# Altium PCB BLERADAR-V12.PcbDoc
Units mil, origin at the board's own origin, x right, y up, seen from the top; angles counter-clockwise.
Board outline 2362.2 x 905.51 mil, 2 copper layers (Top Layer, Bottom Layer), stack 39.335 mil thick; 54 components, 30 nets, 236 pads, 29 vias.
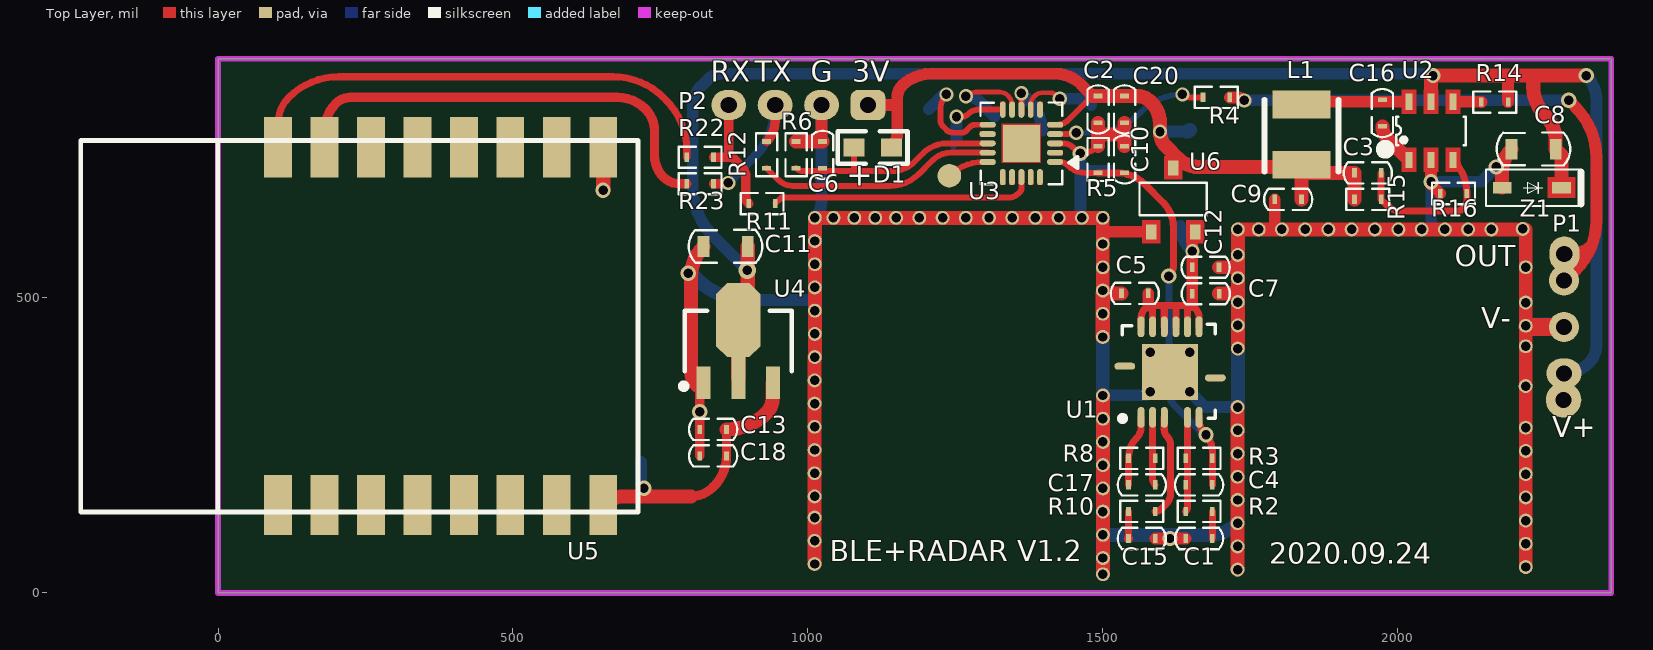
[diagram p0: Top Layer view]
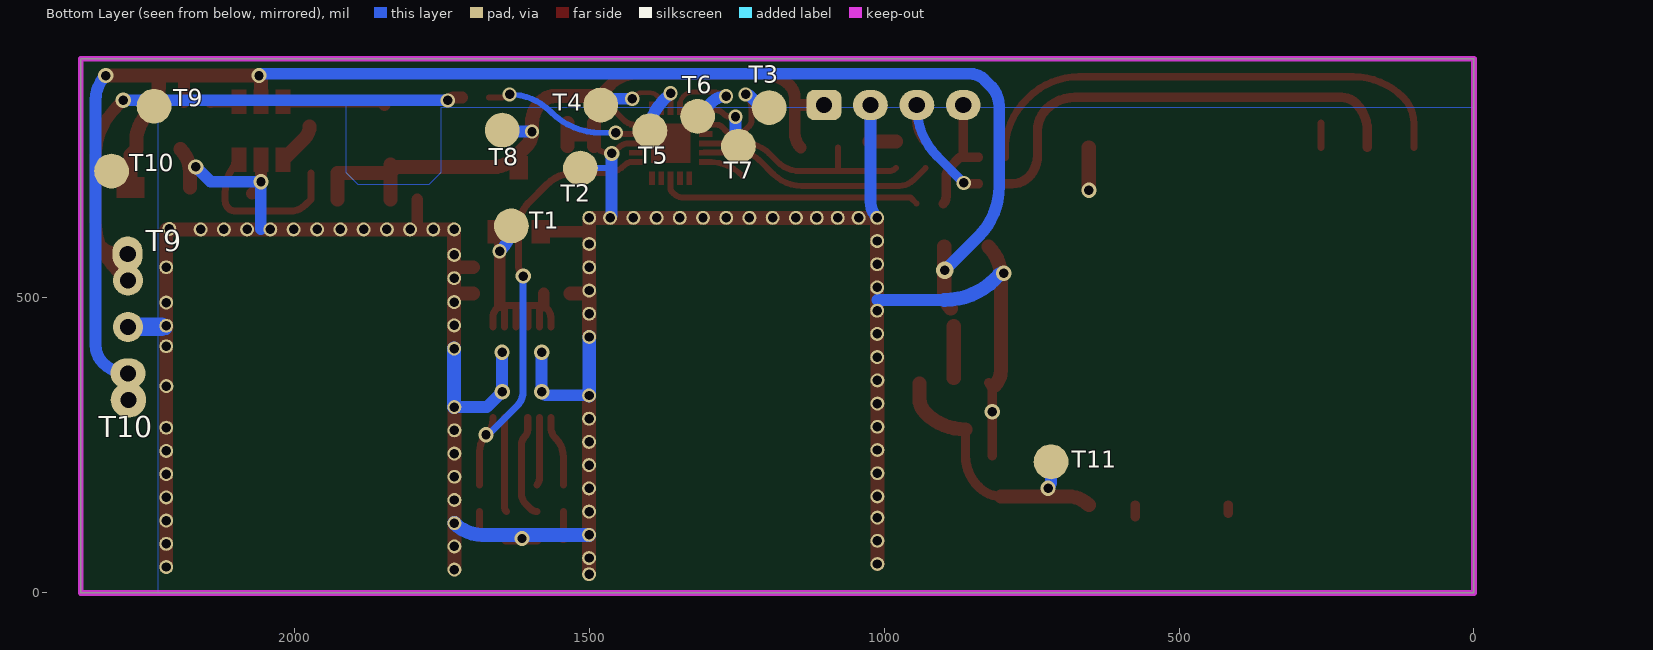
[diagram p1: Bottom Layer view, seen from below]

## Layer stack, top to bottom
Top Layer: signal copper 1.4
Dielectric: core 36.5354, FR-4, Dk 4.8
Bottom Layer: signal copper 1.4

## Board outline
0,0 2362.2,0 2362.2,905.51 0,905.51

## Design rules (kind name [scope] priority, off if disabled: settings)
Clearance [All] p0: scope1count=1 scope1_0_kind=Board scope1_0_value=Board scope2count=1 scope2_0_kind=Board scope2_0_value=Board commentlength=0 gap=10
Clearance [All] p1: gap=10
ComponentClearance [All] p0: scope1count=1 scope1_0_kind=Board scope1_0_value=Board scope2count=1 scope2_0_kind=Board scope2_0_value=Board commentlength=0 gap=10 collisioncheckmode=3
ComponentClearance [All] p1: gap=10 collisioncheckmode=3 verticalgap=10
DiffPairsRouting [All] p0: scope1count=1 scope1_0_kind=Board scope1_0_value=Board scope2count=1 scope2_0_kind=Board scope2_0_value=Board commentlength=0
FanoutControl Fanout_Default [All] p0: scope1count=1 scope1_0_kind=Board scope1_0_value=Board scope2count=1 scope2_0_kind=Board scope2_0_value=Board commentlength=30 // Fanout_Default (Default Rule)
FanoutControl Fanout_Small [All] p0 off: scope1count=1 scope1_0_kind=Board scope1_0_value=Board scope2count=1 scope2_0_kind=Board scope2_0_value=Board commentlength=84 // Protel DXP Scope 1 Expression Was: (CompPinCount < 5)   Fanout_Small (Default Rule)
FanoutControl Fanout_SOIC [All] p0 off: scope1count=1 scope1_0_kind=Board scope1_0_value=Board scope2count=1 scope2_0_kind=Board scope2_0_value=Board commentlength=71 // Protel DXP Scope 1 Expression Was: IsSOIC   Fanout_SOIC (Default Rule)
FanoutControl Fanout_LCC [All] p0 off: scope1count=1 scope1_0_kind=Board scope1_0_value=Board scope2count=1 scope2_0_kind=Board scope2_0_value=Board commentlength=69 // Protel DXP Scope 1 Expression Was: IsLCC   Fanout_LCC (Default Rule)
FanoutControl Fanout_BGA [All] p0 off: scope1count=1 scope1_0_kind=Board scope1_0_value=Board scope2count=1 scope2_0_kind=Board scope2_0_value=Board commentlength=69 // Protel DXP Scope 1 Expression Was: IsBGA   Fanout_BGA (Default Rule)
Height [All] p0: scope1count=1 scope1_0_kind=Board scope1_0_value=Board scope2count=1 scope2_0_kind=Board scope2_0_value=Board commentlength=0
HoleSize [All] p0: scope1count=1 scope1_0_kind=Board scope1_0_value=Board scope2count=1 scope2_0_kind=Board scope2_0_value=Board commentlength=0 absolutevalues=TRUE maxlimit=100 minlimit=1 maxpercent=80.000 minpercent=20.000
LayerPairs [All] p0: scope1count=1 scope1_0_kind=Board scope1_0_value=Board scope2count=1 scope2_0_kind=Board scope2_0_value=Board commentlength=0 enforce=TRUE
PasteMaskExpansion [All] p0: scope1count=1 scope1_0_kind=Board scope1_0_value=Board scope2count=1 scope2_0_kind=Board scope2_0_value=Board commentlength=0 expansion=0
PlaneClearance [All] p0: scope1count=1 scope1_0_kind=Board scope1_0_value=Board scope2count=1 scope2_0_kind=Board scope2_0_value=Board commentlength=0 clearance=20
PlaneConnect [All] p0: scope1count=1 scope1_0_kind=Board scope1_0_value=Board scope2count=1 scope2_0_kind=Board scope2_0_value=Board commentlength=0 planeconnectstyle=Relief reliefexpansion=20 reliefentries=4 reliefconductorwidth=10 reliefairgap=10
PolygonConnect [All] p0: scope1count=1 scope1_0_kind=Board scope1_0_value=Board scope2count=1 scope2_0_kind=Board scope2_0_value=Board commentlength=0 connectstyle=Direct reliefconductorwidth=10 reliefentries=4 polygonreliefangle="90 Angle"
PolygonConnect [All] p1: connectstyle=Direct reliefconductorwidth=10 reliefentries=4 polygonreliefangle="90 Angle"
RoutingCorners [All] p0: scope1count=1 scope1_0_kind=Board scope1_0_value=Board scope2count=1 scope2_0_kind=Board scope2_0_value=Board commentlength=0 cornerstyle=45-Degree minsetback=100 maxsetback=100
RoutingLayers [All] p0: scope1count=1 scope1_0_kind=Board scope1_0_value=Board scope2count=1 scope2_0_kind=Board scope2_0_value=Board commentlength=0 top layer=Automatic bottom layer=Automatic
RoutingPriority [All] p0: scope1count=1 scope1_0_kind=Board scope1_0_value=Board scope2count=1 scope2_0_kind=Board scope2_0_value=Board commentlength=0
RoutingTopology [All] p0: scope1count=1 scope1_0_kind=Board scope1_0_value=Board scope2count=1 scope2_0_kind=Board scope2_0_value=Board commentlength=0 topology=Shortest
RoutingVias [All] p0: scope1count=1 scope1_0_kind=Board scope1_0_value=Board scope2count=1 scope2_0_kind=Board scope2_0_value=Board commentlength=0 holewidth=28 width=50 viastyle="Through Hole" minholewidth=28 minwidth=50 maxholewidth=28 maxwidth=50
RoutingVias [All] p1: holewidth=28 width=50 viastyle="Through Hole" minholewidth=28 minwidth=50 maxholewidth=28 maxwidth=50
ShortCircuit [All] p0: scope1count=1 scope1_0_kind=Board scope1_0_value=Board scope2count=1 scope2_0_kind=Board scope2_0_value=Board commentlength=0 allowed=FALSE
SolderMaskExpansion [All] p0: scope1count=1 scope1_0_kind=Board scope1_0_value=Board scope2count=1 scope2_0_kind=Board scope2_0_value=Board commentlength=0 expansion=4
SolderMaskExpansion [All] p1: expansion=4
TestPointUsage [All] p0: scope1count=1 scope1_0_kind=Board scope1_0_value=Board scope2count=1 scope2_0_kind=Board scope2_0_value=Board commentlength=0 valid=0 allowmultiple=FALSE
TestPointUsage [All] p1: valid=0 allowmultiple=FALSE
Testpoint [All] p0: scope1count=1 scope1_0_kind=Board scope1_0_value=Board scope2count=1 scope2_0_kind=Board scope2_0_value=Board commentlength=0 side=3 testpointundercomponent=TRUE minsize=40 maxsize=100 preferedsize=60 minholesize=0 maxholesize=40 preferedholesize=32 testpointgrid=1 style=297 order=0-112345678
Testpoint [All] p1: side=3 testpointundercomponent=TRUE minsize=40 maxsize=100 preferedsize=60 minholesize=0 maxholesize=40 preferedholesize=32 testpointgrid=1 style=297 order=0-112345678
UnRoutedNet [All] p0: scope1count=1 scope1_0_kind=Board scope1_0_value=Board scope2count=1 scope2_0_kind=Board scope2_0_value=Board commentlength=0
Width [All] p0: scope1count=1 scope1_0_kind=Board scope1_0_value=Board scope2count=1 scope2_0_kind=Board scope2_0_value=Board commentlength=0 maxlimit=60 minlimit=8 preferedwidth=10
Width [All] p1: maxlimit=60 minlimit=8 preferedwidth=10 toplayer_prefwidth=8 bottomlayer_minwidth=10 minimp=50.000000 maximp=50.000000 favimp=50.000000
18 further rules are at their usual default settings.

## Components (designator, comment, footprint, x,y, rotation, side; value= is the part's Value field where it differs from the comment)
C1 "4.7uF" C0402 1685.94,92.05 r180 top
C2 "10uF" C0402 1492.05,842.32 r270 top
C3 "22pF" C0402 1972.05,712.05 r180 top
C4 "1nF" C0402 1685.94,182.99 r180 top
C5 "0.5pF" C0402 1577.05,507.68 r180 top
C6 "0.1uF" C0402 1025,720 r90 top
C7 "0.1uF" C0402 1652.05,507.05 r0 top
C8 "10uF/16V" C0603 2267.05,752.05 r180 top
C9 "10uF" C0402 1837.05,667.05 r180 top
C10 "0.1uF" C0402 1537.05,712.05 r90 top
C11 "10uF/16V" C0603 897.05,587.05 r180 top (schematic designator C8)
C12 "10uF" C0402 1651.85,552.05 r0 top
C13 "10uF" C0402 862.05,277.05 r180 top (schematic designator C5)
C15 "1nF" C0402 1588.94,92.05 r180 top
C16 "0.1uF" C0402 1974.18,836.12 r270 top
C17 "1nF" C0402 1588.94,182.99 r180 top
C18 "0.1uF" C0402 862.05,232.05 r180 top (schematic designator C5)
C20 "0.1uF" C0402 1537.05,797.05 r90 top
D1 "PT19-21C" LED-0603 1110,755 r0 top
L1 "PRS3015-100MT" PRS3015 1837.05,832.05 r270 top
P1 "PH2.0-3P" PH2.0-3P 2282.05,372.05 r90 top
P2 "PH2.0-4P" PH2.0-5P 1102.05,827.05 r180 top (schematic designator P1)
R2 "2k" R0402 1685.94,137.99 r180 top
R3 "1M" R0402 1685.94,227.99 r180 top
R4 "200" R0402 1670,840 r0 top
R5 "47k" R0402 1492.05,712.05 r90 top
R6 "47k" R0402 980,720 r90 top
R8 "5.1k" R0402 1588.94,227.99 r180 top
R10 "5.1k" R0402 1588.94,137.99 r180 top
R11 "1k" R0402 945,660 r180 top
R12 "1k" R0402 930,720 r90 top
R14 "47k" R0402 2142.05,832.05 r0 top
R15 "47k" R0402 1972.05,667.05 r180 top
R16 "12k" R0402 2072.05,677.05 r0 top
R22 "1k" R0402 839.98,738.57 r180 top (schematic designator R12)
R23 "1k" R0402 839.98,693.57 r180 top (schematic designator R12)
T1 "" TestPoints#1 1632.05,622.05 r180 bottom
T2 "" TestPoints#1 1515,720 r180 bottom
T3 "" TestPoints#2 1195,835 r180 bottom
T4 "" TestPoints#3 1422.05,827.05 r180 bottom
T5 "" TestPoints#4 1397.05,782.05 r180 bottom
T6 "" TestPoints#5 1317.05,807.05 r180 bottom
T7 "" TestPoints#1 1247.05,757.05 r180 bottom
T8 "" TestPoints#6 1547.05,657.05 r270 bottom
T9 "" TestPoints#7 2230,825 r180 bottom (schematic designator T2)
T10 "" TestPoints#1 2310,715 r180 bottom (schematic designator T2)
T11 "" TestPoints#1 717.05,222.05 r180 bottom (schematic designator T1)
U1 "XBR816" XBR816 1732.28,315.28 r90 top
U2 "SY8120B1ABC" SOT-23-6 2019.18,734.05 r90 top
U3 "HC89S003F4" QFN20(3*3) 1362.05,762.05 r180 top
U4 "ME6208A33PG" SOT89N 882.05,427.05 r90 top (schematic designator U18)
U5 "BT3L" ZS3L 712.05,137.05 r90 top
U6 "ME6216A12M3G" SOT-23-L 1582.05,612.05 r90 top
Z1 "SESD3Z12C" SOD-323 2177.05,687.05 r0 top

## Footprints (in the part's own frame and the unit in brackets; to place one, negate y for a bottom-side part, rotate by r counter-clockwise, add the part's x,y. Pads: shape width x height; smd on the part's side, far side on the other; paste and mask are expansions set on the pad)
C0402 [mm]
  rect 0.2x0.4 smd: 1(0,0) 2(1.15,0)
  silkscreen extent -0.46,-0.46 1.61,0.46
C0603 [mil]
  rect 19.8x35.55 smd: 1(-0.92,0) 2(74,0)
  silkscreen extent -25,-28 99,28
LED-0603 [mm]
  rect 0.9x0.762 smd: 1(-0.8,0) 2(0.8,0)
  silkscreen extent -1.5,-0.7 1.5,0.7
PH2.0-3P [mm]
  oval 1.3x1.5 hole 0.7: 1(0,0)
  round 1.3 hole 0.7: 2(2,0) 3(4,0)
PH2.0-5P [mm]
  rrect50% 1.5x1.3 hole 0.7: 1(0,0)
  oval 1.5x1.3 hole 0.7: 2(2,0) 3(4,0) 4(6,0)
PRS3015 [mm]
  rect 1.2x2.5 smd: 1(0.1,0) 2(2.7,0)
  silkscreen extent -0.1,-1.6 3,1.6
QFN20(3*3) [mm]
  rect 1.6x1.6 smd: 0(0,0)
  oval 0.7x0.25 smd: 1(-1.45,0.8) 2(-1.45,0.4) 3(-1.45,0) 4(-1.45,-0.4) 5(-1.45,-0.8) 11(1.45,-0.8) 12(1.45,-0.4) 13(1.45,0) 14(1.45,0.4) 15(1.45,0.8)
  oval 0.25x0.7 smd: 6(-0.8,-1.45) 7(-0.4,-1.45) 8(0,-1.45) 9(0.4,-1.45) 10(0.8,-1.45) 16(0.8,1.45) 17(0.4,1.45) 18(0,1.45) 19(-0.4,1.45) 20(-0.8,1.45)
  Top Layer region: -0.925,-1.8 -0.675,-1.8 -0.675,-1.219 -0.925,-1.219
  Top Layer region: -0.85,-0.85 0.85,-0.85 0.85,0.85 -0.85,0.85
  Top Layer region: -0.525,-1.8 -0.275,-1.8 -0.275,-1.219 -0.525,-1.219
  Top Layer region: -0.125,-1.8 0.125,-1.8 0.125,-1.219 -0.125,-1.219
  Top Layer region: 0.275,-1.8 0.525,-1.8 0.525,-1.219 0.275,-1.219
  Top Layer region: 0.675,-1.8 0.925,-1.8 0.925,-1.219 0.675,-1.219
  Top Layer region: 1.8,-0.925 1.8,-0.675 1.219,-0.675 1.219,-0.925
  Top Layer region: 1.8,-0.525 1.8,-0.275 1.219,-0.275 1.219,-0.525
  Top Layer region: 1.8,-0.125 1.8,0.125 1.219,0.125 1.219,-0.125
  Top Layer region: 1.8,0.275 1.8,0.525 1.219,0.525 1.219,0.275
  Top Layer region: 1.8,0.675 1.8,0.925 1.219,0.925 1.219,0.675
  Top Layer region: 0.925,1.8 0.675,1.8 0.675,1.219 0.925,1.219
  Top Layer region: 0.525,1.8 0.275,1.8 0.275,1.219 0.525,1.219
  Top Layer region: 0.125,1.8 -0.125,1.8 -0.125,1.219 0.125,1.219
  Top Layer region: -0.275,1.8 -0.525,1.8 -0.525,1.219 -0.275,1.219
  Top Layer region: -0.675,1.8 -0.925,1.8 -0.925,1.219 -0.675,1.219
  Top Layer region: -1.8,0.925 -1.8,0.675 -1.219,0.675 -1.219,0.925
  Top Layer region: -1.8,0.525 -1.8,0.275 -1.219,0.275 -1.219,0.525
  Top Layer region: -1.8,0.125 -1.8,-0.125 -1.219,-0.125 -1.219,0.125
  Top Layer region: -1.8,-0.275 -1.8,-0.525 -1.219,-0.525 -1.219,-0.275
  Top Layer region: -1.8,-0.675 -1.8,-0.925 -1.219,-0.925 -1.219,-0.675
  silkscreen extent -2.43,-1.76 1.76,1.76
R0402 [mm]
  rect 0.2x0.4 smd: 1(0,0) 2(1.15,0)
  silkscreen extent -0.35,-0.46 1.5,0.46
SOD-323 [mm]
  rect 0.8x0.5 smd: A(0,0) K(2.56,0)
  Top Layer region: 1.958,-0.452 3.161,-0.452 3.161,0.451 1.958,0.451
  silkscreen extent -0.69,-0.8 3.4,0.78
SOT89N [mm] "SOT89, 3-Leads, Body 4.5x2.4 mm, Pitch 1.5mm, Lead Span 4.1mm, IPC Medium Density"
  rect 1.4x0.6 smd: 1(-1.8,1.5) 3(-1.8,-1.5)
  rect 1.8x0.6 smd: 2(-1.6,0)
  oct 3.2x1.9 smd: 2(0.9,0)
  silkscreen extent -2.07,-2.3 1.3,2.47
SOT-23-6 [mm]
  rect 0.7x0.3 smd: 1(0,0) 2(0,-0.95) 3(0,-1.9) 4(2.5,-1.9) 5(2.5,-0.95) 6(2.5,0)
  Top Layer region: 1.972,-2.226 3.025,-2.226 3.025,-1.573 1.972,-1.573
  Top Layer region: 1.972,-1.276 3.025,-1.276 3.025,-0.623 1.972,-0.623
  Top Layer region: 1.973,-0.325 3.026,-0.325 3.026,0.328 1.973,0.328
  Top Layer region: -0.527,-2.226 0.526,-2.226 0.526,-1.573 -0.527,-1.573
  Top Layer region: -0.527,-1.276 0.526,-1.276 0.526,-0.623 -0.527,-0.623
  Top Layer region: -0.526,-0.325 0.527,-0.325 0.527,0.328 -0.526,0.328
  silkscreen extent 0.63,-2.45 1.86,0.54
SOT-23-L [mm]
  rect 0.65x0.45 smd: 1(0,0) 2(0,-1.9) 3(2.757,-0.95)
  Top Layer region: 2.256,-1.362 3.259,-1.362 3.259,-0.559 2.256,-0.559
  Top Layer region: -0.501,-2.306 0.502,-2.306 0.502,-1.503 -0.501,-1.503
  Top Layer region: -0.501,-0.401 0.502,-0.401 0.502,0.402 -0.501,0.402
  silkscreen extent 0.71,-2.4 2.11,0.5
TestPoints#1 [mm] "TestPoints"
  round 1.5 smd: 1(0,0)
TestPoints#2 [mm] "TestPoints"
  round 1.5 smd: 1(0,-0.314)
TestPoints#3 [mm] "TestPoints"
  round 1.5 smd: 1(-1.485,0)
TestPoints#4 [mm] "TestPoints"
  round 1.5 smd: 1(0,0.038)
TestPoints#5 [mm] "TestPoints"
  round 1.5 smd: 1(0.02,0.02)
TestPoints#6 [mm] "TestPoints"
  round 1.5 smd: 1(-3.236,-2.555)
TestPoints#7 [mm] "TestPoints"
  round 1.5 smd: 1(-0.202,0)
XBR816 [mm] "QFN24"
  oval 0.9x0.3 smd: 1(-0.45,4.25) 2(-0.45,3.75) 3(-0.45,3.25) 5(-0.45,2.25) 6(-0.45,1.75) 13(3.45,1.75) 14(3.45,2.25) 15(3.45,2.75) 16(3.45,3.25) 17(3.45,3.75) 18(3.45,4.25)
  oval 0.3x0.9 smd: 10(1.25,1.05) 21(1.75,4.95)
  rect 2.4x2.4 smd: 25(1.5,3)
  silkscreen extent -0.61,1.05 3.55,5.16
ZS3L [mm]
  rect 2.6x1.2 smd: 1(0.3,15.5) 2(0.3,13.5) 3(0.3,11.5) 4(0.3,9.5) 5(0.3,7.5) 6(0.3,5.5) 7(0.3,3.5) 8(0.3,1.5) 9(15.7,1.5) 10(15.7,3.5) 11(15.7,5.5) 12(15.7,7.5) 13(15.7,9.5) 14(15.7,11.5) 15(15.7,13.5) 16(15.7,15.5)
  silkscreen extent 0,0 16,24

## Part data
C1 C2 C3 C4 C5 C6 C7 C8 C9 C10 C11 C12 C13 C15 C16 C17 C18 C20: library part Cap, "Capacitor"
D1: library part "Photo Sen", "Photosensitive Diode"
L1: library part Inductor, "Inductor"
P1: library part "Header 3", "Header, 3-Pin"
P2: library part CON5, "Connector"
R2 R3 R4 R5 R6 R8 R10 R11 R12 R14 R15 R16 R22 R23: library part Res2, "Resistor"
T1 T2 T3 T4 T5 T6 T7 T8 T9 T10 T11: library part TestPoints, "TestPoints"
U1: library part XBR1000_24_1
U2: library part H9108
U3: "MCU"
U4: library part ME6208A50PG
U6: library part SSP6206
Z1: library part "D Zener", "Zener Diode"

## Free pads (board coordinates)
  round 40 smd: 0(1240,707)
  round 60 hole 27.56: 0(2281.42,327.05)
  oval 51.18x59.06 hole 27.56: 0(2282.68,574.53)
  round 23.62 hole 16: 1(1011.46,48.82) 1(1011.46,88.19) 1(1011.46,127.56) 1(1011.46,163.38) 1(1011.46,202.75) 1(1011.46,242.13) 1(1011.46,281.5) 1(1011.46,320.87) 1(1011.46,360.24) 1(1011.81,399.61) 1(1011.81,438.98) 1(1011.81,478.35) 1(1011.81,517.72) 1(1011.81,557.09) 1(1011.81,596.46) 1(1011.81,635.83) 1(1043.35,635.83) 1(1078.78,635.83) 1(1114.23,635.83) 1(1149.66,635.83) 1(1189.03,635.83) 1(1228.4,635.83) 1(1267.77,635.83) 1(1307.14,635.83) 1(1346.51,635.83) 1(1385.88,635.83) 1(1425.25,635.83) 1(1464.62,635.83) 1(1500.06,433.78) 1(1500.06,473.15) 1(1500.06,512.52) 1(1500.06,551.89) 1(1500.06,591.42) 1(1500.06,635.83) 1(1500.37,31.5) 1(1500.37,58.98) 1(1500.37,98.35) 1(1500.37,137.72) 1(1500.37,177.09) 1(1500.37,216.46) 1(1500.37,255.83) 1(1500.37,295.2) 1(1500.37,334.57) 1(1728.72,39.29) 1(1728.72,78.66) 1(1728.72,118.03) 1(1728.72,157.4) 1(1728.72,196.77) 1(1728.72,236.14) 1(1728.72,275.51) 1(1728.72,314.88) 1(1729.03,533.46) 1(1729.03,572.83) 1(1729.03,616.14) 1(1729.03,414.09) 1(1729.03,453.46) 1(1729.03,492.83) 1(1764.46,616.13) 1(1803.83,616.13) 1(1843.2,616.14) 1(1882.57,616.14) 1(1921.94,616.14) 1(1961.42,616.14) 1(2001.42,616.14) 1(2040.79,616.14) 1(2080.16,616.14) 1(2119.53,616.14) 1(2158.9,616.15) 1(2212.05,617.05) 1(2217.05,350.39) 1(2217.22,43.7) 1(2217.22,83.07) 1(2217.22,122.44) 1(2217.22,161.81) 1(2217.22,201.18) 1(2217.22,240.55) 1(2217.22,279.92) 1(2217.22,418.03) 1(2217.22,452.76) 1(2217.22,492.13) 1(2217.22,552.05)

## Via types
v1: diameter 26, hole 16, Top Layer to Bottom Layer, tented both sides, 17 vias
v2: diameter 24, hole 16, Top Layer to Bottom Layer, tented both sides, 11 vias
v3: diameter 30, hole 15.75, Top Layer to Bottom Layer, tented both sides, 1 vias

## Nets (pads, with @x,y where several pads share a name; then routed paths per layer and width w, separated by ;. In a path a pad name is that pad's centre, name@x,y a point inside that pad or via, vN(x,y) a via of type N, cw(c..) or ccw(c..) an arc to the next point about the centre after c; other vN are vias at no path point)
1.2V: C5.1 C7.1 C12.1 T1.1 U1.13 U1.14 U1.15 U1.16 U1.17 U1.18 U6.2 | length 470.3
  Top Layer w12: U1.18 1564.96,464.94 cw(c1589.16,464.94) 1572.05,482.05 1573.51,483.51 cw(c1582.05,474.98) 1582.05,487.05 1647.05,487.05 cw(c1647.05,474.98) 1655.58,483.51 1657.05,482.05 cw(c1641.74,466.74) 1663.39,466.74 U1.13 ; U1.17 1584.65,484.45 ; U1.16 1604.33,484.33 ; U1.15 1624.02,485.08 ; U1.14 1643.7,483.7
  Top Layer w20: 1577.05,487.05 C5.1 ; 1651.85,488.05 U6.2@1651.85,602.05
  Bottom Layer w20: T1.1 ccw(c1687.57,622.05) 1648.31,582.78 v2(1652.05,579.05)
3.3V: C13.1 C18.1 T11.1 U4.3 U5.8 | length 472.5
  Top Layer w16: 802.05,163.54 ccw(c802.05,215.44) 838.74,178.74 840.83,180.83 ccw(c789.62,232.05) C18.1 C13.1
  Top Layer w23.62: U5.8 cw(c688.45,113.41) 688.45,163.54 802.05,163.54
  Top Layer w24: C13.1@862.52,277.05 ccw(c862.52,372.48) 930,305 ccw(c905.86,329.14) 940,329.14 U4.3@940,355
  Bottom Layer w20: T11.1 717.05,189.12 ccw(c734.12,189.12) v1(722.05,177.05)
3V: C2.1 C3.2 C9.1 C20.2 D1.2 L1.2 P2.1 R15.2 T8.1 U3.5 U6.3 | length 1279.6
  Top Layer w10: P2.1 P2.1@1118.76,843.76 ; U3.5 1421.52,793.54 ccw(c1421.52,822.58) 1442.05,802.05 1481.52,841.52 ; 1481.52,841.52 ccw(c1480.72,842.32) 1481.85,842.32 cw(c1480.72,842.32) 1481.52,841.52
  Top Layer w20: P2.1 1150,827.05 ; D1.2 ccw(c1117.35,779.14) 1151.5,779.14 1151.5,839.47 cw(c1180.53,839.47) 1160,860 cw(c1208.28,811.72) 1208.28,880 1420,880 cw(c1420,819.64) 1462.68,862.32 1480.14,844.86 cw(c1476.81,841.52) 1481.52,841.52
  Top Layer w24: 1481.85,842.32 1557.24,842.32 cw(c1557.24,807.24) 1582.05,832.05 cw(c1545.83,795.83) 1597.05,795.83 v2(1597.05,782.05) ccw(c1633.26,782.05) 1607.65,756.44 1627.05,737.05 ccw(c1663.26,773.26) 1663.26,722.05 1827.05,722.05 ccw(c1851.19,746.19) 1851.19,712.05 C3.2 R15.2 ; C9.1 L1.2
  Bottom Layer w20: v2(1597.05,782.05) T8.1@1641.84,782.05
  Bottom Layer w24: T8.1@1641.84,782.05 ccw(c1641.84,790.25) T8.1
+10V: C8.1 C11.1 P1.1 pad.0@2281.42,327.05 R14.2 T10.1 U2.5 U4.2 Z1.K | length 2891.6
  Top Layer w20: R14.2 2187.32,870.58
  Top Layer w24: U4.2@882.05,364.06 U4.2@882.05,452.05 ; U4.2@887.05,482.05 ccw(c860.68,508.41) 897.97,508.41 C11.1 ; U2.5 2056.57,868.78 cw(c2068.27,868.78) v1(2060,877.05) v1(2320,877.05) ; 2187.32,870.58 cw(c2196.46,870.58) 2190,877.05 ; 2230,877.05 2230,858.28 ccw(c2298.28,858.28) 2250,810 cw(c2206.62,766.62) 2267.97,766.62 C8.1 2277.83,742.18 Z1.K
  Bottom Layer w20: v3(897.05,547.05) 840.36,603.74 cw(c925.71,689.09) 805,689.09 805,825 cw(c853.28,825) 819.14,859.14 830,870 cw(c854.14,845.86) 854.14,880 860,880 2052.87,880 cw(c2052.87,869.92) v1(2060,877.05) ; P1.1 ccw(c2282.05,432.4) 2324.72,389.72 ccw(c2294.98,419.47) 2337.05,419.47 2337.05,835.89 ccw(c2278.84,835.89) v1(2320,877.05)
GND: C1.2 C2.2 C5.2 C6.2 C7.2 C8.2 C9.2 C10.2 C11.2 C12.2 C13.2 C15.1 C18.2 C20.1 P1.2 P2.2 pad.1 R5.2 R6.2 R16.1 T2.1 U1.25 U2.2 U3.3 U4.1 U5.9 U6.1 Z1.A | length 5951.7
  Top Layer w10: 993.31,769.36 ccw(c999.09,769.36) 995,765.28 ; U3.3 1432.99,762.05 cw(c1432.99,737.99) 1450,755 1458.55,746.45 ccw(c1462.05,749.94) v1(1462.05,745) 1462.3,745 ccw(c1462.3,787.07) R5.2
  Top Layer w16: U4.1@812.42,351.68 cw(c801.9,341.16) U4.1@816.77,341.16 ; C18.2 U4.1@816.77,341.16 ; U4.1 ccw(c838.01,341.16) U4.1@816.77,341.16
  Top Layer w20: 1023.31,769.36 P2.2 ; 1500.06,612.05 U6.1 ; C15.1 C1.2 ; 1787.05,616.14 ccw(c1775.64,627.55) 1791.77,627.55 C9.2 ; 1791.77,616.81 ccw(c1792.71,616.81) pad.1@1792.05,616.14 ; U2.2 2056.58,692.51 R16.1
  Top Layer w23.62: pad.1@1011.46,48.82 pad.1@1011.46,399.61 ; pad.1@1011.81,399.61 1011.81,635.83 1500.06,635.83 pad.1@1500.06,507.68 ; R5.2 C2.2 ; 1492.05,777.05 1537.05,777.05 ; pad.1@1500.37,32.05 pad.1@1500.37,334.57 ; C10.2 C20.1 ; C12.2 1729.03,552.05 ; pad.1@1728.72,39.29 pad.1@1728.72,314.88 ; pad.1@1729.03,414.09 pad.1@1729.03,492.83 ; pad.1@1729.03,494.09 1729.03,616.14 2217.22,616.14 pad.1@2217.22,43.7
  Top Layer w24: v1@652.99,682.01 U5.9 ; U4.1@812.42,351.68 cw(c837.45,376.71) 802.05,376.71 802.05,536.35 cw(c873.75,536.35) C11.2 ; R6.2 C6.2 ; pad.1@1500.06,433.78 1500.06,507.68 C5.2 ; C7.2@1697.32,507.68 1728.4,507.68 ; Z1.A 2177.05,713.42 cw(c2231.67,713.42) C8.2
  Top Layer w30: pad.1@2220.26,450.79 P1.2
  Bottom Layer w10: 1462.05,720 T2.1
  Bottom Layer w20: v1@805.58,538.51 812.28,531.81 ; 897.64,496.46 1011.81,496.46 ; pad.1@1011.81,635.83 ccw(c984.06,663.58) 1023.31,663.58 P2.2 ; v1(1462.05,745) 1462.05,642.05 ccw(c1470.84,642.05) pad.1@1464.62,635.83 ; pad.1@1500.06,334.88 1574.41,334.88 1580.83,341.3 v1(1580.83,407.99) ; v1(1647.83,407.68) 1647.83,340.98 1673.94,314.88 pad.1@1728.72,314.88 ; 2057.05,617.05 2057.05,697.05 2142.05,697.05 v1(2167.05,722.05) ; pad.1@2217.22,447.4 cw(c2225.39,439.23) pad.1@2225.39,450.79
  Bottom Layer w23.62: pad.1@1500.06,334.88 pad.1@1500.06,433.78 ; pad.1@1500.37,98.35 1681.19,98.35 ccw(c1681.19,165.56) pad.1@1728.72,118.03 ; pad.1@1729.03,315.2 pad.1@1729.03,414.09
  Bottom Layer w24: v1(797.05,542.05) cw(c797.05,529.98) v1@805.58,538.51 ; 812.28,531.81 ccw(c897.64,617.17) 897.64,496.46
  Bottom Layer w31.5: pad.1@2225.39,450.79 P1.2
  other v1: 1614.05,92.05 816.77,307.05 1580.51,340.98 1647.52,340.67 652.75,682.75 2056.58,697.05
LIGHT_CHECK: C6.1 D1.1 R6.1 U3.13 | length 381.4
  Top Layer w10: R6.1 ccw(c992.07,732.07) 992.07,715 1142.58,715 ccw(c1142.58,769.13) 1180.85,730.85 1195,745 cw(c1236.16,703.84) 1236.16,762.05 U3.13 ; D1.1 1078.5,718.61 ccw(c1083.61,718.61) 1080,715
NetC1_1: C1.1 R2.1 | length 45.9
  Top Layer w12: C1.1 R2.1
NetC3_1: C3.1 R15.1 R16.2 U2.3 | length 292.1
  Top Layer w12: C3.1 R15.1 1981.44,657.65 ccw(c2007.05,683.26) 2007.05,647.05 2099.98,647.05 ccw(c2099.98,664.12) 2112.05,652.05 ccw(c2099.31,664.78) 2117.32,664.78 2117.32,677.66 ccw(c2037.58,677.66) U2.3
  Top Layer w20: U2.3 cw(c2085.49,725.57) U2.3@2097.48,725.57
NetC4_1: C4.1 C10.1 R3.1 R5.1 U1.6 U3.1 | length 754.5
  Top Layer w10: U3.1 1426.6,730.55 cw(c1426.6,711.6) 1440,725 ccw(c1471.27,756.27) 1471.27,712.05 R5.1@1491.19,712.05
  Top Layer w12: R5.1@1491.19,712.05 1506.69,712.05 1523.76,712.05 cw(c1523.76,643.76) 1572.05,692.05 1602.37,661.72 cw(c1559.69,619.05) 1620.05,619.05 1620.05,556.36 cw(c1592.73,556.36) v1(1612.05,537.05) v1@1612.05,537.83 ; U1.6 1663.39,293.79 ccw(c1699.79,293.79) 1674.05,268.05 cw(c1645.34,239.34) 1685.94,239.34 C4.1
  Bottom Layer w12: v1(1612.05,537.05) 1612.05,342.05 ccw(c1648.26,342.05) 1622.65,316.44 1668.22,270.88 ccw(c1675.05,277.7) v1(1675.05,268.05)
NetC4_2: C4.2 R2.2 R3.2 U1.5 | length 160.4
  Top Layer w12: R2.2 ccw(c1633.32,145.33) 1643.7,145.33 U1.5
NetC15_2: C15.2 R10.2 | length 45.9
  Top Layer w12: C15.2 R10.2
NetC16_1: C16.1 L1.1 U2.6 | length 174.4
  Top Layer w20: L1.1@1847.05,827.05 1852.47,832.47 U2.6
NetC16_2: C16.2 U2.1 | length 74.2
  Top Layer w23.62: C16.2 ccw(c2002.66,790.84) 1982.52,770.71 U2.1
NetC17_1: C17.1 R8.1 U1.2 | length 115.7
  Top Layer w12: U1.2 1584.65,193.35 ccw(c1599.3,193.35) C17.1
NetC17_2: C17.2 R8.2 U1.1 | length 120.3
  Top Layer w12: C17.2 1543.66,229.73 cw(c1589.36,229.73) 1557.05,262.05 ccw(c1537.94,281.15) 1564.96,281.15 U1.1
NetP1_3: P1.3 pad.0@2282.68,574.53 R4.2 T9.1 | length 966.1
  Top Layer w20: R4.2 1727.93,840 cw(c1727.93,822.93) v2(1740,835) ; P1.3 ccw(c2282.05,535.52) 2286.28,531.28 2301.69,546.69 ccw(c2216.34,632.05) 2337.05,632.05 2337.05,737.95 ccw(c2216.34,737.95) 2301.69,823.31 v1(2290,835) ; pad.0@2282.68,574.53 2292.65,574.53 ccw(c2292.65,627.35) 2330,590
  Bottom Layer w20: v2(1740,835) v1(2290,835)
NetP2_3: P2.3 R12.2 R23.1 | length 268.3
  Top Layer w16: R23.1 861.54,693.57 ccw(c861.54,698.46) v2(865,695) ; R12.2 ccw(c894.83,800.44) 944.57,800.44 P2.3 P2.3@944.57,809.61
  Bottom Layer w16: v2(865,695) 909.21,739.21 ccw(c823.86,824.57) 944.57,824.57 P2.3
NetP2_4: P2.4 R11.2 R22.1 | length 222.6
  Top Layer w16: R22.1 865.83,738.57 ; P2.4@853.76,832.05 cw(c853.76,814.98) P2.4 865.83,740.56 ; 865,738.57 ccw(c863,740.56) 865.83,740.56 ; R11.2 cw(c911.13,671.41) 895,671.41 895,705 ccw(c870.86,705) 887.93,722.07 871.99,738.01 ccw(c865.83,731.85) 865.83,740.56
NetR4_1: R4.1 U3.4 | length 270.4
  Top Layer w10: U3.4 1449.68,777.8 ccw(c1449.68,785.32) v2(1455,780) ; v2(1635,845) ccw(c1647.07,857.07) 1647.07,840 R4.1
  Bottom Layer w10: v2(1455,780) 1480,780 ccw(c1480,900.71) 1565.36,815.36 1566.72,816.72 cw(c1635,748.43) v2(1635,845)
NetR10_1: R10.1 U1.3 | length 175
  Top Layer w12: R10.1 ccw(c1588.94,152.61) 1599.27,142.27 1607.05,150.05 ccw(c1587.73,169.36) 1615.05,169.36 1615.05,250.56 ccw(c1594.56,250.56) 1609.05,265.05 cw(c1620.43,276.43) 1604.33,276.43 U1.3
NetR11_1: R11.1 U3.18 | length 447.8
  Top Layer w10: R11.1 955,670 1340,670 ccw(c1340,694.14) 1357.07,677.07 1360,680 ccw(c1355.06,684.94) 1362.05,684.94 U3.18
NetR12_1: R12.1 U3.14 | length 404.4
  Top Layer w10: R12.1 950,700 ccw(c974.14,724.14) 974.14,690 978.45,690 1140,690 ccw(c1140,757.6) 1187.8,709.8 1211,733 cw(c1243.11,700.89) 1243.11,746.3 1285.21,746.3 U3.14
NetR14_1: R14.1 U2.4 | length 48.2
  Top Layer w20: U2.4 2141.02,832.47 cw(c2141.02,831.02) R14.1
NetR22_2: R22.2 U5.16 | length 856
  Top Layer w12: U5.16 101.81,796.09 cw(c163.91,796.09) 120,840 cw(c204.5,755.5) 204.5,875 670,875 cw(c670,754.29) 755.36,839.64 759.35,835.65 cw(c674,750.29) 794.71,750.29 R22.2
NetR23_2: R23.2 U5.15 | length 820.9
  Top Layer w12: U5.15 U5.15@180.55,797.22
  Top Layer w16: U5.15 180.55,783.05 cw(c246.95,783.05) 200,830 cw(c224.14,805.86) 224.14,840 676.72,840 cw(c676.72,771.72) 725,820 cw(c688.79,783.79) 740,783.79 740,741.21 ccw(c791.21,741.21) 755,705 ccw(c782.6,732.6) 782.6,693.57 R23.2
NetT3_1: T3.1 U3.11 | length 182
  Top Layer w10: v2(1235,845) ccw(c1259.14,820.86) 1225,820.86 1225,800 ccw(c1237.07,800) 1228.54,791.46 1235,785 ccw(c1247.07,797.07) 1247.07,780 1260,780 ccw(c1260,792.07) 1268.54,783.54 1275,790 cw(c1283.55,781.45) 1283.55,793.54 1299.8,793.54 U3.11
  Bottom Layer w20: T3.1@1205,820 1226.46,841.46 cw(c1235,832.93) v2(1235,845)
NetT4_1: T4.1 U3.7 | length 129.2
  Top Layer w8: U3.7 1377.8,828.37 cw(c1395.73,828.37) 1383.05,841.05 1383.68,841.68 cw(c1399.05,826.32) 1399.05,848.05 1410.59,848.05 cw(c1410.59,833) 1421.23,843.64 v2(1427.05,837.83)
  Bottom Layer w20: v2(1427.05,837.83) 1454.49,837.83 cw(c1454.49,801.03) T4.1
NetT5_1: T5.1 U3.8 | length 103
  Top Layer w10: U3.8 v2(1362.05,847.05)
  Bottom Layer w20: v2(1362.05,847.05) 1376.88,832.22 cw(c1328.19,783.52) T5.1
NetT6_1: T6.1 U3.9 | length 161.5
  Top Layer w8: v2(1268.05,842.05) cw(c1284.95,825.15) 1284.95,849.05 1325.05,849.05 cw(c1325.05,829.73) 1338.7,843.39 1340.05,842.05 cw(c1324.95,826.95) 1346.3,826.95 U3.9
  Bottom Layer w20: v2(1268.05,842.05) cw(c1268.05,808.25) 1291.95,832.15 T6.1
NetT7_1: T7.1 U3.10 | length 133.1
  Top Layer w10: v2(1252.05,807.05) 1259.98,807.05 ccw(c1259.98,824.12) 1272.05,812.05 cw(c1289.16,794.94) 1289.16,819.13 1298.3,819.13 U3.10
  Bottom Layer w10: T7.1 ccw(c1234.98,769.12) T7.1@1252.05,769.12
  Bottom Layer w20: T7.1@1252.05,769.12 v2(1252.05,807.05)
pads on no net: U1.10 U1.21 U3.0 U3.2 U3.6 U3.12 U3.15 U3.16 U3.17 U3.19 U3.20 U5.1 U5.2 U5.3 U5.4 U5.5 U5.6 U5.7 U5.10 U5.11 U5.12 U5.13 U5.14
copper on no net: | length 149.6
  Top Layer w8: 1393.54,703.06 1393.54,704.96
  Top Layer w10: 1240,707 cw(c1296.86,650.14) 1296.86,730.55 1304.96,730.55 ; 1393.54,703.06 1393.54,704.96
  Top Layer w12: 259.29,755.16 259.29,796.25
  Top Layer w16: 416.77,135.14 416.77,148.86 ; 574.25,129.15 574.25,148.86

## Polygon pours and split planes (outlines as drawn)
GND on Bottom Layer "Bottom Layer-No Net" (solid, remove dead copper, pour order 0): 0,822.05 1752.05,822.05 1752.05,712.05 1772.05,692.05 1892.05,692.05 1912.05,712.05 1912.05,832.05 2232.05,832.05 2232.05,552.05 2232.05,0 0,0 0,822.05

## Keep-outs
Keep-Out Layer:
  the board outline again, w10

## Silkscreen, mask and mechanical layers (free items; w line width, h text height)
Top Overlay:
  circle w16: c1979.05,752.05 r8
  text "RX" at 835,855 h60
  text "TX" at 910,855 h60
  text "G" at 1005,855 h60
  text "3V" at 1075,855 h60
  text "OUT" at 2097.05,542.05 h60
  text "V-" at 2142.05,437.05 h60
  text "V+" at 2262.05,252.05 h60
  text "BLE+RADAR V1.2" at 1037.05,42.05 h60
  text "2020.09.24" at 1782.05,37.05 h60
Bottom Overlay:
  text "T9" at 2252.05,567.05 h60
  text "T10" at 2332.05,252.05 h60
Top Solder:
  lines w23.62: 1011.46,48.82 1011.46,399.61 1011.81,635.83 1500.06,635.83 1500.06,433.78 ; 1500.37,31.5 1500.37,334.57 ; 1728.72,39.29 1728.72,314.88 ; 1729.03,414.09 1729.03,616.14 2217.22,616.14 ; 2216.87,43.7 2217.22,279.92 ; 2216.87,279.92 2217.37,616.14

## Text inside footprints (layer, text, board x,y; h text height)
D1: Top Overlay "+" at 1065,690 h39.37